# Altium PCB PCB.PcbDoc
Units mm, origin at the board's own origin, x right, y up, seen from the top; angles counter-clockwise.
Board outline 97.37 x 50.3 mm, 2 copper layers (Top Layer, Bottom Layer), stack 0.781 mm thick; 42 components, 27 nets, 110 pads, 5 vias.
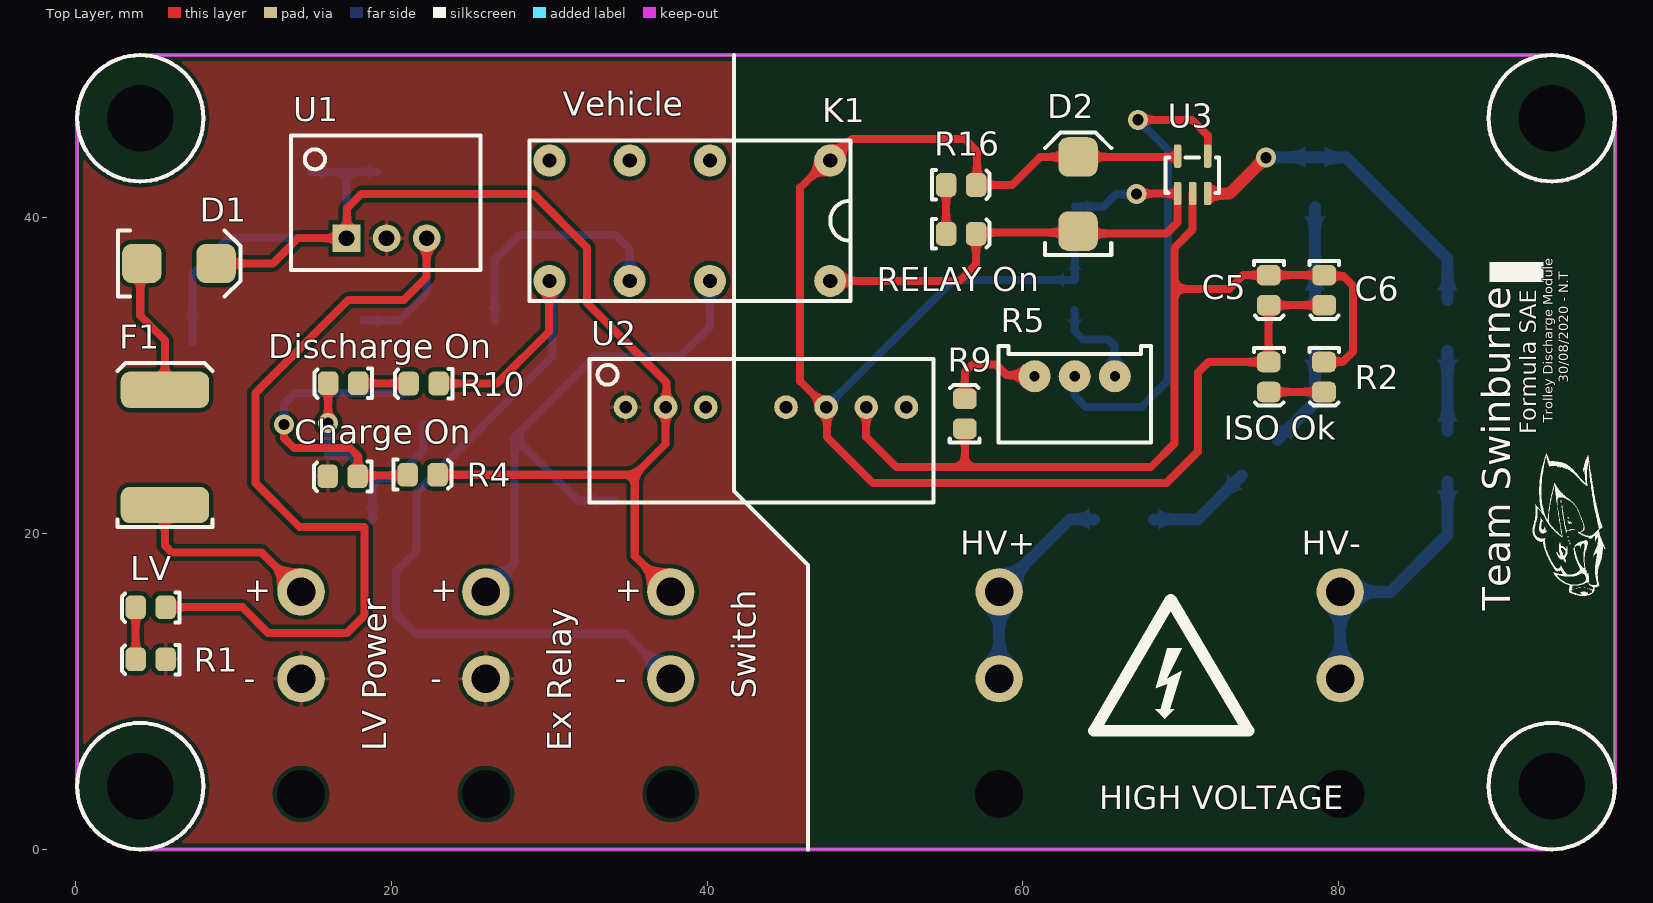
[diagram p0: Top Layer view]
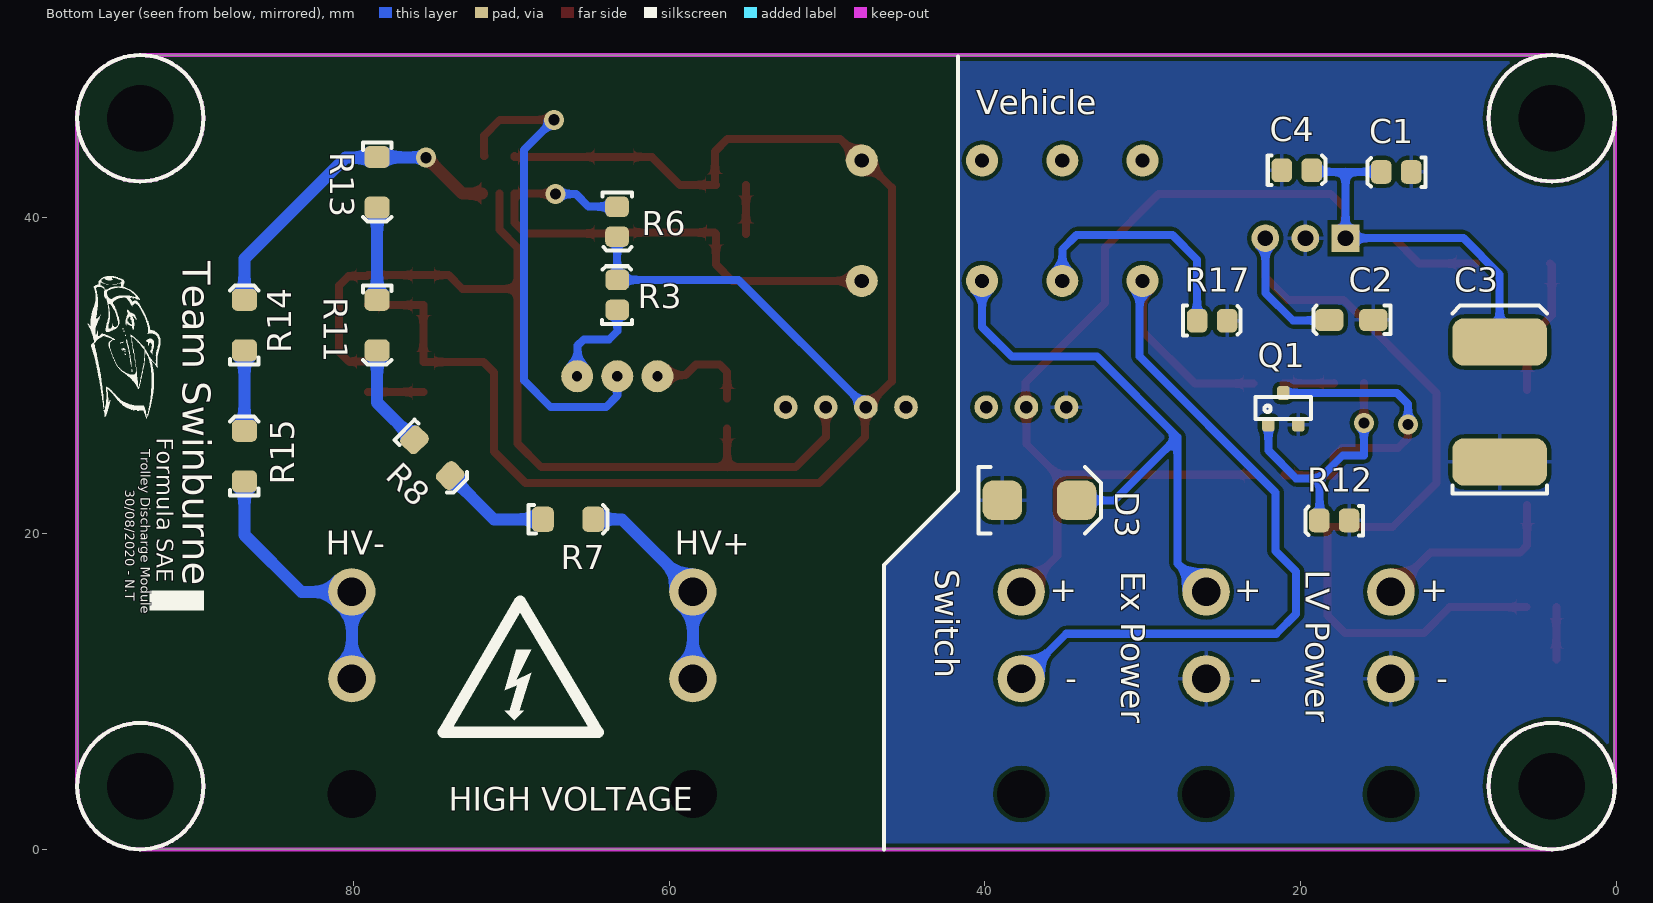
[diagram p1: Bottom Layer view, seen from below]
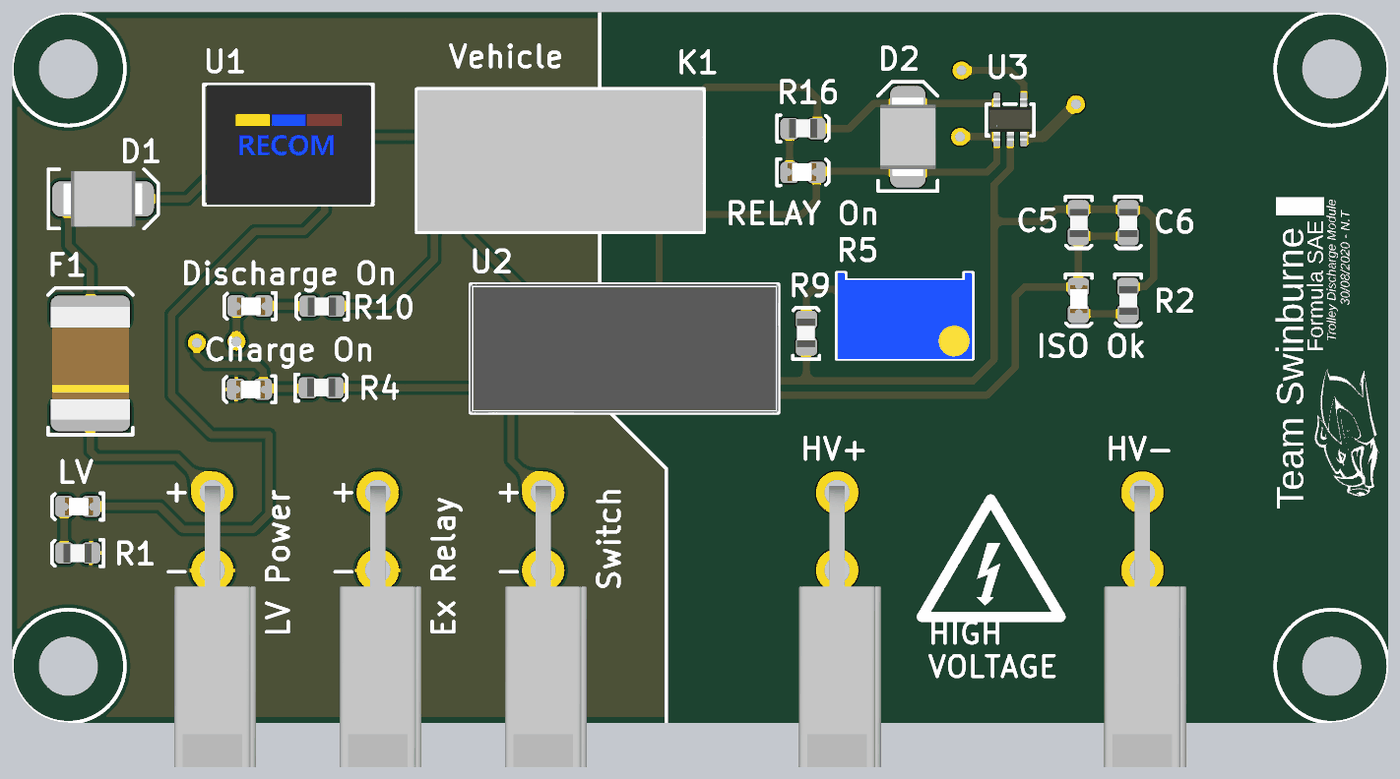
[diagram p2: 3D render of the assembled board from above, using the file's embedded part models]
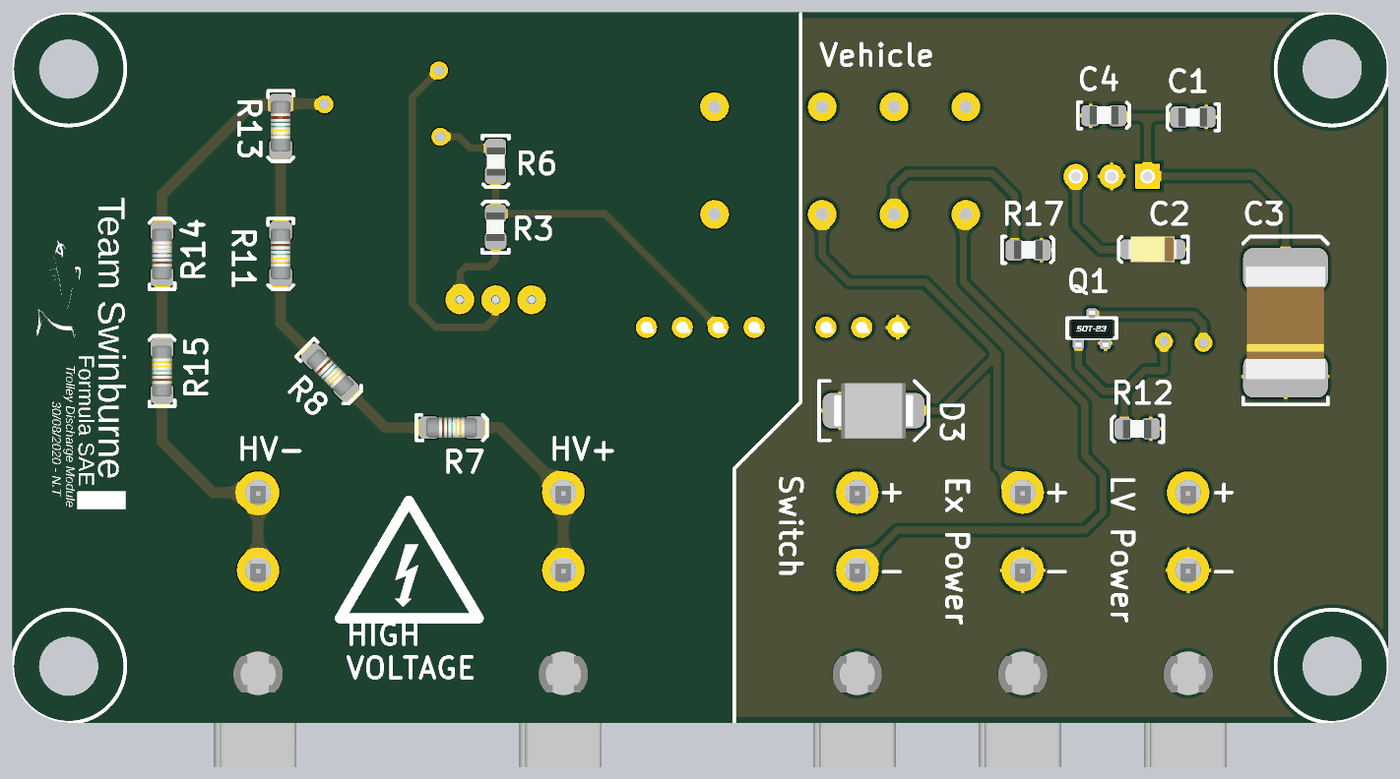
[diagram p3: 3D render of the assembled board from below, using the file's embedded part models]

## Layer stack, top to bottom
Top Solder: solder mask 0.0254, SM-001, Dk 4
Top Layer: signal copper 0.035
Dielectric x: core 0.7112, Core-039, Dk 4.8
Bottom Layer: signal copper 0.035
Bottom Solder: solder mask 0.0254, SM-001, Dk 4

## Board outline
4.1,0 93.5,0 ccw(c93.5,4) 97.5,4 97.5,46.4 ccw(c93.6,46.4) 93.6,50.3 4.1,50.3 ccw(c4.1,46.327) 0.127,46.327 0.127,3.973 ccw(c4.1,3.973)

## Design rules (kind name [scope] priority, off if disabled: settings)
Clearance [InNet('HV+')] p1: gap=3 ignorepadtopadclearanceinfootprint=FALSE except(1: Arc-SMDPad Track-SMDPad SMDPad-SMDPad)
Clearance Clearance_1 [All] p2: gap=0.254 ignorepadtopadclearanceinfootprint=FALSE
PolygonConnect [All] p1: connectstyle=Relief reliefconductorwidth=0.254 reliefentries=4 polygonreliefangle="90 Angle" airgapwidth=0.254
RoutingVias [All] p1: holewidth=0.711 width=1.27 viastyle="Through Hole" minholewidth=0.711 minwidth=1.27 maxholewidth=0.711 maxwidth=1.27
SolderMaskExpansion [All] p1: expansion=0.102 istentingtop=FALSE
Width [All] p1: maxlimit=1.16 minlimit=0.254 preferedwidth=0.508 minimp=50.000000 maximp=50.000000 favimp=50.000000
30 further rules are at their usual default settings.

## Classes and differential pairs
component class U_Switch: "Charge On" D2 "Discharge On" K1 Q1 R3 R4 R5 R6 R7 R8 R9 R10 R11 R12 R13 R14 R15 R16 R17 "RELAY On" Switch U3
component class U_Power: C1 C2 C3 C4 C5 C6 D1 F1 "ISO Ok" LV R1 R2 U1 U2
component class "Top Level": D3 "Ex Relay" HV+ HV- "LV Power"

## Components (designator, comment, footprint, x,y, rotation, side; value= is the part's Value field where it differs from the comment)
C1 "10uF" 0805 13.962,42.874 r0 bottom
C2 "22uF" 1206 18,33.525 r0 bottom
C3 "47uF" 2924 7.4,28.279 r90 bottom
C4 "100nF" 0805 20.238,43.026 r180 bottom
C5 "330nF" 0805 75.6,35.4 r270 top
C6 "10uF" 0805 79.107,35.4 r270 top
"Charge On" "Red" "0805 LED" 16.9,23.6 r180 top
D1 "SD560BTR" "SMB Diode" 4.45,37.1 r0 top
D2 "SD560BTR" "SMB Diode" 63.5,39.4 r90 top
D3 "SD560BTR" "SMB Diode" 38.65,22.1 r180 bottom
"Discharge On" "Red" "0805 LED" 16.935,29.496 r180 top
"Ex Relay" "39300020" 39300020 25.994,10.8 r0 top
F1 "0ZCF0100AF2A" 2920 5.662,21.8 r90 top
HV+ "39300020" 39300020 58.5,10.8 r0 top
HV- "39300020" 39300020 80.1,10.8 r0 top
"ISO Ok" "Green" "0805 LED" 75.6,29.9 r270 top
K1 "V23105A5303A201" "TI 2-DIL" 38.91,39.81 r180 top
LV "Green" "0805 LED" 4.747,15.303 r180 top
"LV Power" "39300020" 39300020 14.288,10.8 r0 top
Q1 "BC817-16LT1" "ON SOT-23 BJT" 21.1,27.9 r180 bottom
R1 "1k" 0805 4.747,12.003 r180 top
R2 "1k" 0805 79.1,29.9 r270 top
R3 "10k" 0805 63.312,35.124 r90 bottom
R4 "1.6k" 0805 21.997,23.746 r0 top
R5 "10K (Var)" "B 3296" 63.2,29.4 r180 top
R6 "4.7k" 0805 63.274,39.738 r270 bottom
R7 "330K" "VB 0204" 66.4,20.9 r180 bottom
R8 "330K" "VB 0204" 75,24.8 r225 bottom
R9 "6.8k" 0805 56.3,27.6 r90 top
R10 "1.6k" 0805 22.038,29.474 r180 top
R11 "330K" "VB 0204" 78.5,33.2 r270 bottom
R12 "10k" 0805 17.9,20.8 r0 bottom
R13 "330K" "VB 0204" 78.5,42.25 r270 bottom
R14 "10K" "VB 0204" 86.9,33.2 r90 bottom
R15 "10K" "VB 0204" 86.9,24.9 r90 bottom
R16 "1k" 0805 56.1,42.1 r0 top
R17 "4.7k" 0805 25.6,33.5 r180 bottom
"RELAY On" "Red" "0805 LED" 56.1,39 r0 top
Switch "39300020" 39300020 37.7,10.8 r0 top
U1 "R-78C12-1.0" "RECOM 3-SIP" 17.161,38.7 r0 top
U2 "TMR 3-1212WI" "TRECO 8-SIP" 32.55,21.95 r0 top
U3 "TS391ILT" "ON SOT-23-5" 69.175,40.563 r0 top

## Footprints (in the part's own frame and the unit in brackets; to place one, negate y for a bottom-side part, rotate by r counter-clockwise, add the part's x,y. Pads: shape width x height; smd on the part's side, far side on the other; paste and mask are expansions set on the pad)
0805 [mm]
  rrect50% 1.3x1.5 smd: 1(-0.962,-0.026) 2(0.938,-0.026)
  silkscreen extent -1.85,-0.95 1.8,0.93, body extent -1,-0.65 1,0.66, height 0.73
"0805 LED" [mm]
  rrect50% 1.3x1.5 smd: A(-0.962,-0.026) K(0.938,-0.026)
  silkscreen extent -1.85,-0.95 1.8,0.93, body extent -1.1,-0.62 0.9,0.63, height 1
1206 [mm]
  rrect50% 1.8x1.4 smd: 1(-2.6,0) 2(0.2,0)
  silkscreen extent -3.7,-0.9 1.2,0.9, body extent -2.9,-0.9 0.5,0.9, height 1.85
2920 [mm]
  rrect50% 2.3x5.6 smd: 1(0,0) 2(7.3,0)
  silkscreen extent -1.4,-3 9,3, body extent -0.34,-2.81 7.64,2.81, height 1.14
2924 [mm]
  rrect50% 3x6 smd: 1(-3.75,0) 2(3.85,0)
  silkscreen extent -5.75,-3 6.15,3, body extent -3.94,-2.81 4.04,2.81, height 1.14
39300020 [mm]
  round 3 hole 1.8: 1(0,0) 2(0,5.5)
  round 1.524 hole 3.05: ""(0,-7.3)
  body extent -2.7,-13.97 3.1,5.97, height 11.4
"B 3296" [mil]
  round 80 hole 25.2: 1(-103.39,-22) 2(-3.39,-22) 3(96.61,-22)
  silkscreen extent -193,-97 187,143, body extent -191,-97 184,143, height 455
"ON SOT-23 BJT" [mm] "NUP2105L"
  rrect50% 0.8x0.9 smd: B(-0.95,-1) C(0,1) E(0.95,-1)
  silkscreen extent -1.75,-0.65 1.75,0.75, body extent -1.5,-1.28 1.5,1.27, height 1
"ON SOT-23-5" [mil]
  rrect50% 19x58 smd: 1(24.61,38.39) 2(62.01,38.39) 3(99.41,38.39) 4(99.41,131.39) 5(24.61,131.39)
  silkscreen extent -5,39 128,128, body extent 2,27 122,145, height 57
"RECOM 3-SIP" [mm] "12 to 42 Vdc In, 9 Vdc Out"
  rect 1.75x1.75 hole 1: 1(0,0)
  round 1.75 hole 1: 2(2.54,0) 3(5.08,0)
  silkscreen extent -3.5,-2 8.5,6.5, body extent -3.26,-2.02 8.34,6.48, height 11.41
"SMB Diode" [mm]
  rrect50% 2.5x2.5 smd: A(-0.25,0) K(4.45,0)
  silkscreen extent -1.75,-2.1 6,2.1, body extent -0.69,-1.97 4.9,1.97, height 2.5
"TI 2-DIL" [mil]
  round 80 hole 35.43: 1(-350,-150) 4(-50,-150) 6(150,-150) 8(350,-150) 9(350,150) 11(150,150) 13(-50,150) 16(-350,150)
  silkscreen extent -400,-200 400,200, body extent -398,-197 398,197, height 450
"TRECO 8-SIP" [mm]
  round 1.5 hole 0.8: 1(2.29,6.05) 2(4.83,6.05) 3(7.37,6.05) 5(12.45,6.05) 6(14.99,6.05) 7(17.53,6.05) 8(20.07,6.05)
  silkscreen extent 0,0 21.8,9.1, body extent 0,0 21.8,9.1, height 11.2
"VB 0204" [mm]
  rrect50% 1.4x1.6 smd: 1(-1.6,0) 2(1.6,0)
  silkscreen extent -2.5,-0.9 2.5,0.9, body extent -1.8,-0.7 1.8,0.7, height 1.4

## Part data
C1 C6: library part GRM21BR6YA106KE43L, Digikey Part Number=490-10514-6-ND, Manufacturer=muRata, Rated Voltage=50V, Tolerance=10%, Material=X5R, Part Number=GRM21BR6YA106KE43L
C2: library part CC1206MKX5R7BB226, Digikey Part Number=311-1997-2-ND, Manufacturer=YAGEO, Rated Voltage=16V, Tolerance=20%, Material=Ceramic, Part Number=CC1206MKX5R7BB226
C3: library part TAJV476K035RNJ, Digikey Part Number=478-8934-1-ND, Manufacturer="AVX Corporation", Rated Voltage=35V, Tolerance=10%, Material=Tantalum, Part Number=TAJV476K035RNJ
C4: library part GCM21BR71H104KA37L, Digikey Part Number=490-6064-1-ND, Manufacturer=muRata, Rated Voltage=50V, Tolerance=±10%, Material=X7R, Part Number=GCM21BR71H104KA37L
C5: library part GCM219R71H334KA55D, Digikey Part Number=490-8045-1-ND, Manufacturer=muRata, Rated Voltage=50V, Tolerance=±10%, Material=X7R, Part Number=GCM219R71H334KA55D
"Charge On" "Discharge On" "RELAY On": library part SML-210LTT86, "Red LED Indication - Discrete 1.75V 0805 (2012 Metric)", Digikey Part Number=511-1286-1-ND, Manufacturer="ROHM Semiconductor", Colour=Red, Digikey Link=https://www.digikey.com/product-detail/en/rohm-semiconductor/SML-210LTT86/511-1286-1-ND/637099, Part Number=SML-210LTT86
D1 D2 D3: "1.2V_F 600V 5A SMB", Digikey Part Number=1655-1530-2-ND, Manufacturer="SMC Diode Solutions", Digikey Link=https://www.digikey.com/product-detail/en/smc-diode-solutions/SD560BTR/1655-1530-2-ND/6022620, Part Number=SD560BTR
"Ex Relay" HV+ HV- "LV Power" Switch: Digikey Part Number=WM21351-ND, Angle=90, Contact=Tin, Flange=No, Part Number=39300020, Pitch=4.2mm, Positions=2, Row Spacing=5.5mm
F1: "PTC RESET FUSE 60V 1A 292", Digikey Part Number=507-2070-1-ND, Manufacturer="Littelfuse Inc.", Digikey Link=https://www.digikey.com/product-detail/en/bel-fuse-inc/0ZCF0100AF2A/507-2070-1-ND/6210547, Part Number=0ZCF0100AF2A
"ISO Ok" LV: library part SML-210FTT86, "Green LED Indication - Discrete 1.75V 0805 (2012 Metric)", Digikey Part Number=511-1285-1-ND, Manufacturer="ROHM Semiconductor", Colour=Green, Digikey Link=https://www.digikey.com/product-detail/en/rohm-semiconductor/SML-210FTT86/511-1285-1-ND/637098, Part Number=SML-210FTT86
K1: "RELAY TELECOM DPDT 3A 12V", Digikey Part Number=PB387-ND, Manufacturer="TE Connectivity", Digikey Link=https://www.digikey.com/product-detail/en/te-connectivity-potter-brumfield-relays/V23105A5303A201/PB387-ND/291023, Part Number=V23105A5303A201
Q1: "300mW  BJT NPN Transistor", Digikey Part Number=BC817-16LT1OSTR-ND, Manufacturer="ON Semiconductor", Digikey Link=https://www.digikey.com.au/product-detail/en/on-semiconductor/BC817-16LT1/BC817-16LT1OSTR-ND/606178, Part Number=BC817-16LT1
R1 R2 R16: library part RC0805FR071KL, Digikey Part Number=311-1.00KCRCT-ND, Manufacturer=YAGEO, Rated Voltage=0.125W, Tolerance=0.01, Material=FR-07, Part Number=RC0805FR071KL
R3 R12: library part RC0805FR0710KL, Digikey Part Number=311-10.0KCRCT-ND, Manufacturer=YAGEO, Rated Voltage=0.125W, Tolerance=0.01, Material=FR-07, Part Number=RC0805FR0710KL
R4 R10: library part RC0805FR071K6L, Digikey Part Number=311-1.60KCRCT-ND, Manufacturer=YAGEO, Rated Voltage=0.125W, Tolerance=0.01, Material=FR-07, Part Number=RC0805FR071K6L
R5: library part 3296W-1-103LF, Digikey Part Number=3296W-103LF-ND, Manufacturer="Bournes Inc", Rated Voltage=0.5W, Tolerance=0.1, Part Number=3296W-1-103LF
R6 R17: library part RC0805FR074K7L, Digikey Part Number=311-4.70KCRCT-ND, Manufacturer=YAGEO, Rated Voltage=0.125W, Tolerance=0.01, Material=FR-07, Part Number=RC0805FR074K7L
R7 R8 R11 R13: library part MMA02040C3303FB300, Digikey Part Number=MMA-330KACT-ND, Manufacturer="Vishay Beyschlag", Rated Voltage=0.4W, Tolerance=0.01, Part Number=MMA02040C3303FB300
R9: library part RC0805FR076K8L, Digikey Part Number=311-6.80KCRCT-ND, Manufacturer=YAGEO, Rated Voltage=0.125W, Tolerance=0.01, Material=FR-07, Part Number=RC0805FR076K8L
R14 R15: library part MMA02040C1002FB300, Digikey Part Number=MMA-10KACT-ND, Manufacturer="Vishay Beyschlag", Rated Voltage=0.4W, Tolerance=0.01, Part Number=MMA02040C1002FB300
U1: "3PIN DC DC CONVERTER 12V 12W", Digikey Part Number=945-1392-5-ND, Manufacturer=Recom, Digikey Link=https://www.digikey.com/products/en/power-supplies-board-mount/dc-dc-converters/922?k=R-78C&k=&pkeyword=R-78C&sv=0&pv1525=44&sf=0&FV=ffe0039a&quantity=&ColumnSort=0&page=1&pageSize=25, Isolation=Non-Isolated, Part Number=R-78C12-1.0
U2: "DC DC CONVERTER 12V 3W", Digikey Part Number=1951-2367-ND, Manufacturer="Traco Power", Digikey Link=https://www.digikey.com.au/product-detail/en/traco-power/TMR-3-1212WI/1951-2367-ND/9383402, Isolation=Isolated, Part Number="TMR 3-1212WI"
U3: "IC COMP LO PWR SGL V SOT 23-5L", Digikey Part Number=497-2275-2-ND, Manufacturer=STMicroelectronics, Digikey Link=https://www.digikey.com/product-detail/en/stmicroelectronics/TS391ILT/497-2275-2-ND/599407, Part Number=TS391ILT

## Free pads (board coordinates)
  round 0 hole 4.2 unplated: 2(4.1,4) 2(4.1,46.3) 2(93.5,46.3) 2(93.5,4)

## Via types
v1: diameter 1.27, hole 0.711, Top Layer to Bottom Layer, 5 vias

## Nets (pads, with @x,y where several pads share a name; then routed paths per layer and width w, separated by ;. In a path a pad name is that pad's centre, name@x,y a point inside that pad or via, vN(x,y) a via of type N, cw(c..) or ccw(c..) an arc to the next point about the centre after c; other vN are vias at no path point)
0V: "Charge On.K" "Ex Relay.1" "LV Power.1" C1.1 C2.1 C3.1 C4.1 D3.A Q1.E R1.1 R12.1 R17.2 U1.2 U2.1
"0V (ISO)": C5.1 C6.1 R2.1 R9.1 U2.7 U3.2 | length 59.8
  Top Layer w0.508: U2.7 50.08,26.12 52,24.2 56.326,24.2 ; R9.1 56.326,24.2 ; U3.2 70.75,39.25 69.6,38.1 69.6,35.5 ; R2.1 79.1,30.888 80.288,30.888 80.9,31.5 80.9,35.7 80.295,36.305 79.138,36.305 C6.1 C5.1 73.962,36.362 73.1,35.5 69.6,35.5 ; 56.326,24.2 68.1,24.2 69.6,25.7 69.6,35.5
12V: C2.2 LV.A U1.3 | length 57.7
  Top Layer w0.508: LV.A 10.571,15.329 12.2,13.7 17.2,13.7 18.3,14.8 18.3,20.4 14.2,20.4 11.4,23.2 11.4,28.9 17.3,34.8 20.8,34.8 22.241,36.241 U1.3
  Bottom Layer w0.508: C2.2 18.225,33.5 20.5,33.5 22.241,35.241 U1.3
"12V (ISO)": "ISO Ok.A" C5.2 C6.2 D2.K K1.1 R3.2 R6.2 R16.2 U2.6 U3.5 | length 109.2
  Top Layer w0.508: U3.5 69.8,43.863 69.787,43.85 D2.K 61.102,43.85 59.326,42.074 R16.2 57.1,42.136 57.1,44.2 56.3,45 49.18,45 K1.1 47.62,43.62 45.9,41.9 45.9,29.64 U2.6 47.6,27.94 47.6,26.1 50.5,23.2 69.1,23.2 71.1,25.2 71.1,30.2 71.762,30.862 75.574,30.862 C5.2 C6.2
  Bottom Layer w0.508: U2.6 55.602,36.062 R3.2 63.293,36.069 63.293,38.793 R6.2
HV+: HV+.1 HV+.2 R7.2 | length 13.6
  Bottom Layer w0.762: HV+.2@58.338,16.3 58.4,16.3 63,20.9 R7.2@64.492,20.9 ; HV+.1 HV+.2
HV-: HV-.1 HV-.2 R15.1 | length 17.2
  Bottom Layer w0.762: HV-.1 HV-.2 83.3,16.3 86.9,19.9 R15.1
LV: C1.2 C3.2 C4.2 D1.K R4.2 Switch.2 U1.1 U2.2 | length 89.6
  Top Layer w0.508: D1.K 12.5,37.1 14.1,38.7 U1.1 17.2,38.739 17.2,40.6 18.1,41.5 29,41.5 32.4,38.1 32.4,34.6 37.434,29.566 37.434,28.054 U2.2 37.38,25.68 35.42,23.72 ; R4.2 35.42,23.72 ; Switch.2 35.42,18.58 35.42,23.72
  Bottom Layer w0.508: C3.2 7.4,36.407 9.699,38.706 17.156,38.706 U1.1 17.161,42.9 ; C1.2 17.161,42.9 ; C4.2@19.1,42.9 17.161,42.9 ; U2.2@37.19,27.81 U2.2
"NetCharge On_A": "Charge On.A" Q1.C R4.1 | length 20
  Top Layer w0.508: v1(13.2,26.9) 13.2,26.049 13.849,25.4 17.4,25.4 17.9,24.9 17.9,23.664 ; 17.862,23.626 17.9,23.664 ; R4.1 20.988,23.673 17.909,23.673 17.9,23.664
  Bottom Layer w0.508: v1(13.2,26.9) 13.2,28.2 13.9,28.9 Q1.C
NetD1_A: D1.A F1.2 | length 8.7
  Top Layer w0.508: D1.A 4.1,37 4.1,33.8 5.662,32.238 F1.2
NetD2_A: "RELAY On.K" D2.A K1.16 R6.1 U3.1 | length 33.3
  Top Layer w0.508: K1.16 56,36 57.038,37.038 57.038,38.974 57.126,39.062 63.412,39.062 63.474,39 69.1,39 69.8,39.7 U3.1@69.8,41.532 ; v1@67.3,41.5 67.319,41.519 69.787,41.519 U3.1@69.8,41.532 ; U3.1 U3.1@69.8,41.532
  Bottom Layer w0.508: R6.1 65.1,40.7 65.9,41.5 v1(67.2,41.5)
NetD3_K: "Ex Relay.2" D3.K K1.13 | length 37.1
  Bottom Layer w0.508: 25.994,16.3 27.8,18.106 27.8,26.1 ; D3.K 31.8,22.1 27.8,26.1 ; K1.13@39.9,36 K1.13 40.18,33.08 38.3,31.2 32.9,31.2 27.8,26.1
"NetDischarge On_A": "Discharge On.A" R10.2 | length 3.2
  Top Layer w0.508: 17.897,29.522 17.908,29.511 21.089,29.511 R10.2
"NetDischarge On_K": "Discharge On.K" Q1.B R12.2 | length 16.3
  Top Layer w0.508: 15.997,29.522 15.999,29.521 v1(16,27) v1(16,27)
  Bottom Layer w0.508: v1(16,27) 16,24.95 17.334,24.95 18.8,23.484 ; R12.2@18.738,20.826 R12.2@18.9,20.988 ; R12.2@18.8,20.988 18.8,23.484 ; Q1.B 22.05,25.25 20.284,23.484 18.8,23.484
NetF1_1: "LV Power.2" F1.1 | length 12.4
  Top Layer w0.508: F1.1 5.662,19.238 6.1,18.8 11.788,18.8 14.288,16.3
"NetISO Ok_K": "ISO Ok.K" R2.2 | length 3.5
  Top Layer w0.508: 75.574,28.962 R2.2
NetK1_9: K1.9 R10.1 Switch.1 | length 55.9
  Top Layer w0.508: R10.1 26.7,29.5 30,32.8 30,35.98 K1.9
  Bottom Layer w0.508: K1.9 30.2,35.82 30.2,31.2 21.6,22.6 21.6,18.9 20.3,17.6 20.3,14.9 21.55,13.65 34.85,13.65 Switch.1
NetK1_11: K1.11 R17.1 | length 15.4
  Bottom Layer w0.508: R17.1 26.562,37.338 28.124,38.9 34.2,38.9 35.1,38 K1.11
NetLV_K: LV.K R1.2 | length 3.3
  Top Layer w0.508: R1.2 LV.K
NetR3_1: R3.1 R5.1 | length 6.2
  Bottom Layer w0.508: R3.1 63.286,32.814 63.8,32.3 65.4,32.3 65.8,31.9 65.8,29.985 R5.1
NetR5_2: R5.2 U3.4 | length 31.6
  Top Layer w0.508: v1(67.3,46.2) 70.725,46.2 71.713,45.213 71.713,43.913 U3.4
  Bottom Layer w0.508: R5.2 63.3,29.945 63.3,28.7 64,28 67.5,28 69.2,29.7 69.2,44.3 v1(67.3,46.2)
NetR5_3: R5.3 R9.2 | length 6.6
  Top Layer w0.508: R9.2 56.326,30.226 56.8,30.7 58.3,30.7 58.968,30.032 60.673,30.032 R5.3
NetR7_1: R7.1 R8.2 | length 6.7
  Bottom Layer w0.762: R7.1@68.3,20.9 71.1,20.9 R8.2
NetR8_1: R8.1 R11.2 | length 6.6
  Bottom Layer w0.762: R8.1 78.5,28.3 R11.2
NetR11_1: R11.1 R13.2 | length 5.9
  Bottom Layer w0.762: R11.1 R13.2
NetR13_1: R13.1 R14.2 U3.3 | length 21.3
  Top Layer w0.762: U3.3@71.84,41.519 73.087,41.519 75.368,43.8 v1(75.4,43.8)
  Bottom Layer w0.762: v1(75.4,43.8) 75.425,43.825 78.475,43.825 R13.1 78.55,43.8 80.5,43.8 86.9,37.4 R14.2
NetR14_1: R14.1 R15.2 | length 5.1
  Bottom Layer w0.762: R15.2 R14.1
NetR16_1: "RELAY On.A" R16.1 | length 3.1
  Top Layer w0.508: 55.138,38.974 R16.1
pads on no net: "Ex Relay." "LV Power." HV+. HV-. K1.4 K1.6 K1.8 Switch. U2.3 U2.5 U2.8

## Polygon pours and split planes (outlines as drawn)
0V on Top Layer "0V_L01_P000" (solid, remove dead copper, pour order 0): 0,50.3 0,0 46.4,0 46.4,18.1 41.7,22.8 41.7,50.3
0V on Bottom Layer "0V_L02_P001" (solid, remove dead copper, pour order 1): 0,50.3 0,0 46.3,0 46.4,0.1 46.4,18.1 41.7,22.8 41.7,50.3

## Keep-outs
Keep-Out Layer:
  circle w0.254: c93.5,4 r4
  circle w0.254: c93.5,46.3 r4
  circle w0.254: c4.1,4 r4
  circle w0.254: c4.1,46.3 r4
  lines w0.254: 0.1,3.9 0.1,46.5 ; 4,0 93.5,0 ; 4.1,50.3 93.5,50.3 ; 97.5,4.3 97.5,46.7

## Silkscreen, mask and mechanical layers (free items; w line width, h text height)
Top Overlay:
  drawing of 31 lines, arcs and shapes, not listed
  text "Vehicle" at 30.854,46.454 h1.52
  text "30/08/2020 - N.T" at 94.751,29.562 h1.02 r90
  text "Trolley Discharge Module" at 93.773,27.01 h1.02 r90
  text "Formula SAE" at 92.873,26.272 h1.78 r90
  text "+" at 10.654,15.7 h1.52
  text "+" at 22.454,15.7 h1.52
  text "+" at 34.154,15.7 h1.52
  text "Team Swinburne" at 91.476,15.096 h3.05 r90
  text "-" at 10.654,10.092 h1.52
  text "-" at 22.454,10.092 h1.52
  text "-" at 34.154,10.092 h1.52
  text "HIGH VOLTAGE" at 64.838,2.531 h1.47
Bottom Overlay:
  drawing of 33 lines, arcs and shapes, not listed
  text "Vehicle" at 40.546,46.554 h1.52
  text "Team Swinburne" at 91.403,37.244 h3.05 r90
  text "Formula SAE" at 92.8,26.068 h1.78 r90
  text "Trolley Discharge Module" at 93.7,25.33 h1.02 r90
  text "30/08/2020 - N.T" at 94.678,22.778 h1.02 r90
  text "HV+" at 59.646,18.654 h1.52
  text "HV-" at 81.746,18.654 h1.52
  text "Switch" at 43.146,17.746 h1.52 r90
  text "LV Power" at 19.68,17.712 h1.52 r90
  text "Ex Power" at 31.38,17.612 h1.52 r90
  text "+" at 10.654,15.7 h1.52
  text "+" at 22.454,15.7 h1.52
  text "+" at 34.154,15.7 h1.52
  text "-" at 10.654,10.092 h1.52
  text "-" at 22.454,10.092 h1.52
  text "-" at 34.154,10.092 h1.52
  text "HIGH VOLTAGE" at 73.966,2.431 h1.47
Drill Drawing:
  circle w0.254: c3.356,62.29 r0.847
  lines w0.254: 2.509,65.677 2.933,65.677 3.356,65.253 3.779,65.677 4.203,65.677 3.779,66.1 4.203,66.523 3.779,66.523 3.356,66.947 2.933,66.523 2.509,66.523 2.933,66.1 2.509,65.677 ; 2.509,69.063 2.509,69.487 2.933,69.91 2.509,70.333 2.509,70.757 2.933,70.757 3.356,70.333 3.779,70.757 4.203,70.757 4.203,70.333 3.779,69.91 4.203,69.487 4.203,69.063 3.779,69.063 3.356,69.487 2.933,69.063 2.509,69.063 ; 2.509,74.567 4.203,74.567 3.356,72.873 2.509,74.567 ; 2.509,76.683 4.203,76.683 4.203,78.377 2.509,78.377 2.509,76.683 ; 2.509,81.34 3.356,80.493 4.203,81.34 3.356,82.187 2.509,81.34 ; 2.509,84.303 3.356,84.727 4.203,84.303 3.779,85.15 4.203,85.997 3.356,85.573 2.509,85.997 2.933,85.15 2.509,84.303 ; 2.509,88.113 4.203,88.113 4.203,89.807 2.509,89.807 2.509,88.113 ; 2.848,77.022 3.864,77.022 3.864,78.038 2.848,78.038 2.848,77.022
  lines w0.381: 0.991,60.3 268.48,60.3 ; 0.991,90.78 268.48,90.78 ; 14.983,56.49 14.983,94.59 ; 28.695,56.49 28.695,94.59 ; 57.897,56.49 57.897,94.59 ; 70.746,56.49 70.746,94.59 ; 89.384,56.49 89.384,94.59 ; 127.473,56.49 127.473,94.59 ; 142.455,56.49 142.455,94.59 ; 161.398,56.49 161.398,94.59 ; 177.904,56.49 177.904,94.59 ; 199.59,56.49 199.59,94.59 ; 233.463,56.49 233.463,94.59 ; 0.991,56.49 268.48,56.49 268.48,94.59 0.991,94.59 0.991,56.49
  text "Symbol" at 3.277,91.923 h1.83
  text "Count" at 16.126,91.923 h1.83
  text "Hole Size" at 29.838,91.923 h1.83
  text "Plated" at 59.04,91.923 h1.83
  text "Hole Type" at 71.889,91.923 h1.83
  text "Drill Layer Pair" at 90.527,91.923 h1.83
  text "Via/Pad" at 128.616,91.923 h1.83
  text "Pad Shape" at 143.598,91.923 h1.83
  text "Template" at 162.541,91.923 h1.83
  text "Description" at 179.047,91.923 h1.83
  text "Hole Tolerance (+)" at 200.733,91.923 h1.83
  text "Hole Tolerance (-)" at 234.606,91.923 h1.83
  text "3" at 16.126,88.113 h1.52
  text "25.20mil (0.640mm)" at 29.838,88.113 h1.52
  text "PTH" at 59.04,88.113 h1.52
  text "Round" at 71.889,88.113 h1.52
  text "Top Layer - Bottom Layer" at 90.527,88.113 h1.52
  text "Pad" at 128.616,88.113 h1.52
  text "Rounded" at 143.598,88.113 h1.52
  text "c203h64" at 162.541,88.113 h1.52
  text "3" at 16.126,84.303 h1.52
  text "39.37mil (1.000mm)" at 29.838,84.303 h1.52
  text "PTH" at 59.04,84.303 h1.52
  text "Round" at 71.889,84.303 h1.52
  text "Top Layer - Bottom Layer" at 90.527,84.303 h1.52
  text "Pad" at 128.616,84.303 h1.52
  text "(Mixed)" at 143.598,84.303 h1.52
  text "(Mixed)" at 162.541,84.303 h1.52
  text "4" at 16.126,80.493 h1.52
  text "165.35mil (4.200mm)" at 29.838,80.493 h1.52
  text "NPTH" at 59.04,80.493 h1.52
  text "Round" at 71.889,80.493 h1.52
  text "Top Layer - Bottom Layer" at 90.527,80.493 h1.52
  text "Pad" at 128.616,80.493 h1.52
  text "Rounded" at 143.598,80.493 h1.52
  text "c0hn420" at 162.541,80.493 h1.52
  text "5" at 16.126,76.683 h1.52
  text "28.00mil (0.711mm)" at 29.838,76.683 h1.52
  text "PTH" at 59.04,76.683 h1.52
  text "Round" at 71.889,76.683 h1.52
  text "Top Layer - Bottom Layer" at 90.527,76.683 h1.52
  text "Via" at 128.616,76.683 h1.52
  text "Rounded" at 143.598,76.683 h1.52
  text "v127h71" at 162.541,76.683 h1.52
  text "5" at 16.126,72.873 h1.52
  text "120.08mil (3.050mm)" at 29.838,72.873 h1.52
  text "PTH" at 59.04,72.873 h1.52
  text "Round" at 71.889,72.873 h1.52
  text "Top Layer - Bottom Layer" at 90.527,72.873 h1.52
  text "Pad" at 128.616,72.873 h1.52
  text "Rounded" at 143.598,72.873 h1.52
  text "c152h305" at 162.541,72.873 h1.52
  text "7" at 16.126,69.063 h1.52
  text "31.50mil (0.800mm)" at 29.838,69.063 h1.52
  text "PTH" at 59.04,69.063 h1.52
  text "Round" at 71.889,69.063 h1.52
  text "Top Layer - Bottom Layer" at 90.527,69.063 h1.52
  text "Pad" at 128.616,69.063 h1.52
  text "Rounded" at 143.598,69.063 h1.52
  text "c150h80" at 162.541,69.063 h1.52
  text "8" at 16.126,65.253 h1.52
  text "35.43mil (0.900mm)" at 29.838,65.253 h1.52
  text "PTH" at 59.04,65.253 h1.52
  text "Round" at 71.889,65.253 h1.52
  text "Top Layer - Bottom Layer" at 90.527,65.253 h1.52
  text "Pad" at 128.616,65.253 h1.52
  text "Rounded" at 143.598,65.253 h1.52
  text "c203h90" at 162.541,65.253 h1.52
  text "10" at 16.126,61.443 h1.52
  text "70.87mil (1.800mm)" at 29.838,61.443 h1.52
  text "PTH" at 59.04,61.443 h1.52
  text "Round" at 71.889,61.443 h1.52
  text "Top Layer - Bottom Layer" at 90.527,61.443 h1.52
  text "Pad" at 128.616,61.443 h1.52
  text "Rounded" at 143.598,61.443 h1.52
  text "c300h180" at 162.541,61.443 h1.52
  text "45 Total" at 16.126,57.633 h1.52
  text "FABRICATION NOTES" at 107.384,44.447 h3
  text "1. QUANTITY: 5" at 107.384,39.351 h3
  text "2. SIZE:" at 107.384,34.254 h3
  text "3. LAYERS: 2" at 107.384,29.158 h3
  text "4. SIGNAL LAYERS: 1,2" at 107.384,25.061 h3
  text "a) WEIGHT: 1oz" at 112.384,18.965 h3
  text "5. PLANES: 0" at 107.384,13.869 h3
  text "a) WEIGHT: 0oz" at 112.384,8.772 h3
  text "6. SOLDER MASKS: Red" at 107.384,3.676 h3
  text "7. SILKSCREEN: White" at 107.384,-1.421 h3
  text "8. SURFACE FINISH: HASL (With Lead)" at 107.384,-6.517 h3
  text "9 FINISHED COPPER: 2oz Cu" at 107.384,-11.613 h3
  text "10. TOTAL THICKNESS: 1.6mm" at 107.384,-16.71 h3

## Dimensions
93.5,4 to 93.5,4 on Drill Drawing
4.1,46.3 to 4.1,46.3 on Drill Drawing
93.5,50.3 to 93.5,0 on Drill Drawing
0.1,46.3 to 97.5,46.3 on Drill Drawing